# Altium PCB 夏友.PcbDoc (part 6 of 6)
Units mm, origin at the board's own origin, x right, y up, seen from the top; angles counter-clockwise.
Board outline 130.55 x 65.02 mm, 2 copper layers (Top Layer, Bottom Layer); 162 components, 175 nets, 628 pads, 694 vias.
Unrouted connection lines stored in the file: 1.
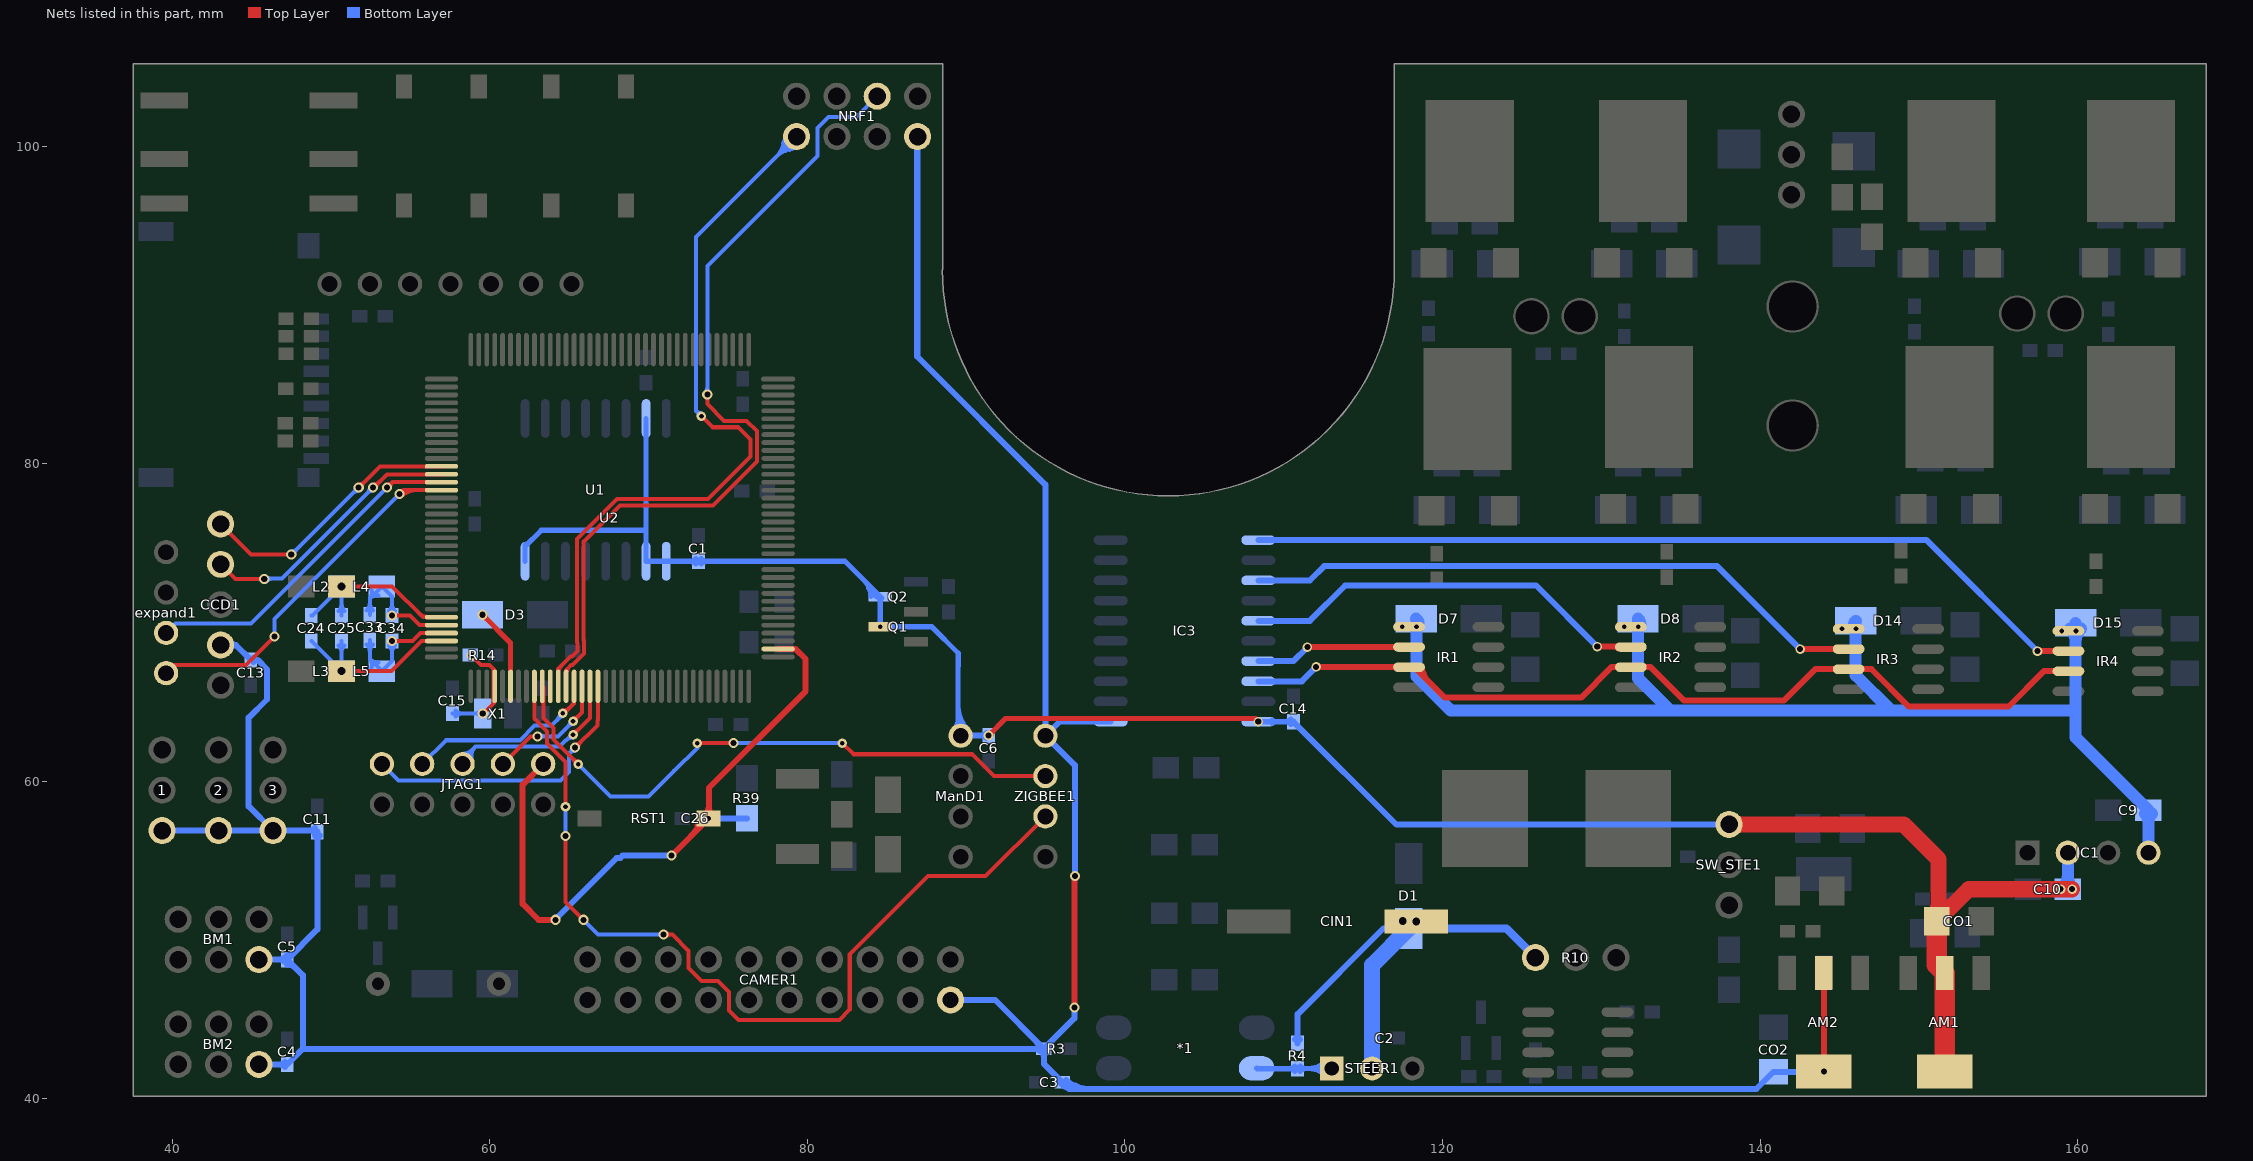
[diagram p6: the nets of this part, all layers, seen from the top]

## Via types
v1: diameter 0.6, hole 0.3, Top Layer to Bottom Layer, 442 vias
v2: diameter 0.635, hole 0.381, Top Layer to Bottom Layer, 150 vias
v3: diameter 0.6, hole 0.381, Top Layer to Bottom Layer, 48 vias
v4: diameter 0.7, hole 0.6, Top Layer to Bottom Layer, 16 vias
v5: diameter 0.6, hole 0.5, Top Layer to Bottom Layer, 10 vias
v6: diameter 0.6, hole 0.4, Top Layer to Bottom Layer, 7 vias
v7: diameter 0.7, hole 0.5, Top Layer to Bottom Layer, 5 vias
v8: diameter 0.6, hole 0.33, Top Layer to Bottom Layer, 5 vias
v9: diameter 0.7, hole 0.4, Top Layer to Bottom Layer, 3 vias
v10: diameter 1, hole 1, Top Layer to Bottom Layer, 2 vias
v11: diameter 3, hole 3, Top Layer to Bottom Layer, 2 vias
v12: diameter 1.016, hole 0.762, Top Layer to Bottom Layer, 2 vias
v13: diameter 0.7, hole 0.381, Top Layer to Bottom Layer, 1 vias
v14: diameter 0.635, hole 0.508, Top Layer to Bottom Layer, 1 vias

## Nets (pads, with @x,y where several pads share a name; then routed paths per layer and width w, separated by ;. In a path a pad name is that pad's centre, name@x,y a point inside that pad or via, vN(x,y) a via of type N, cw(c..) or ccw(c..) an arc to the next point about the centre after c; other vN are vias at no path point) (continued)
PTE9: CCD1.1 U2.12 | length 22.8
  Top Layer w0.254: CCD1.1@43.053,76.2 44.974,74.279 v2(47.502,74.279) ; v2(51.753,78.504) 51.779,78.504 53.106,79.831 U2.12@56.964,79.831 ; v2@51.753,78.694 ccw(c51.753,79.218) 52.123,78.848 cw(c51.753,79.218) v2@51.753,78.694 ; v2@51.943,78.504 cw(c52.339,78.504) 52.059,78.784 ccw(c52.339,78.504) v2@51.943,78.504
  Bottom Layer w0.254: v2(47.502,74.279) 47.527,74.279 v2(51.753,78.504) ; v2@51.562,78.502 cw(c51.121,78.496) 51.436,78.188 cw(c51.745,77.872) v2@51.75,78.313 ; v2@51.562,78.502 cw(c51.115,78.499) 51.427,78.179 ; v2@51.751,78.313 ccw(c51.747,77.866) 51.427,78.179 ; 51.427,78.179 cw(c51.753,77.853) 51.753,78.313 ccw(c51.753,77.853) 51.427,78.179 ; 51.427,78.179 ccw(c51.102,78.504) 51.562,78.504 cw(c51.102,78.504) 51.427,78.179 ; v2@47.502,74.469 ccw(c47.502,74.989) 47.87,74.622 cw(c47.502,74.989) v2@47.502,74.469 ; v2@47.693,74.279 cw(c48.092,74.279) 47.81,74.561 ccw(c48.092,74.279) v2@47.693,74.279
PTE10: CCD1.2 U2.13 | length 22.8
  Top Layer w0.254: CCD1.2@43.053,73.66 43.984,72.729 v2(45.802,72.729) ; v2(52.653,78.504) 52.704,78.504 53.531,79.331 U2.13@56.964,79.331 ; v2@52.653,78.694 ccw(c52.653,79.278) 53.065,78.865 cw(c52.653,79.278) v2@52.653,78.694 ; v2@52.843,78.504 cw(c53.179,78.504) 52.942,78.742 ccw(c53.179,78.504) v2@52.843,78.504
  Bottom Layer w0.254: v2(45.802,72.729) 45.849,72.775 46.924,72.775 v2(52.653,78.504) ; v2@52.462,78.502 cw(c52.021,78.496) 52.336,78.188 cw(c52.645,77.872) 52.65,78.313 ccw(c52.647,77.866) 52.327,78.179 ; v2@52.462,78.502 cw(c52.015,78.499) 52.327,78.179 ; 52.327,78.179 cw(c52.653,77.853) 52.653,78.313 ccw(c52.653,77.853) 52.327,78.179 ; 52.327,78.179 ccw(c52.002,78.504) 52.462,78.504 cw(c52.002,78.504) 52.327,78.179 ; v2@45.937,72.594 cw(c46.374,72.156) 46.374,72.775 ccw(c46.374,72.156) v2@45.937,72.594 ; v2@45.937,72.863 ccw(c46.15,73.076) 46.15,72.775 cw(c46.15,73.076) v2@45.937,72.863
PTE11: expand1.3 U2.14 | length 25.5
  Top Layer w0.254: v2(53.536,78.491) 53.875,78.831 U2.14@56.964,78.831 ; v2@53.537,78.682 ccw(c53.541,79.129) 53.861,78.817 ; v2@53.54,78.682 ccw(c53.551,79.104) 53.853,78.809 ccw(c54.148,78.507) v2@53.726,78.496 ; v2@53.726,78.493 cw(c54.173,78.497) 53.861,78.817 ; 53.851,78.807 cw(c53.543,79.123) 53.538,78.682 ccw(c53.543,79.123) 53.851,78.807 ; 53.852,78.807 ccw(c54.167,78.499) 53.726,78.494 cw(c54.167,78.499) 53.852,78.807 ; 53.861,78.817 cw(c53.536,79.142) 53.536,78.682 ccw(c53.536,79.142) 53.861,78.817 ; 53.861,78.817 ccw(c54.186,78.491) 53.726,78.491 cw(c54.186,78.491) 53.861,78.817
  Bottom Layer w0.254: expand1.3@39.624,69.342 40.207,69.925 44.969,69.925 v2(53.536,78.491)
PTE12: expand1.4 U2.15 | length 27.4
  Top Layer w0.254: expand1.4@39.624,66.802 40.147,67.325 44.65,67.325 v2(46.45,69.125) ; v2(54.325,78.1) 54.556,78.331 ; v2@54.374,78.284 ccw(c54.439,78.526) 54.564,78.309 ; v2@54.434,78.256 ccw(c54.697,78.634) 54.927,78.235 ; v2@54.511,78.139 cw(c54.683,78.175) 54.596,78.327 ; U2.15@56.964,78.331 54.556,78.331 ; 54.556,78.331 cw(c54.425,78.462) 54.376,78.284 ccw(c54.425,78.462) 54.556,78.331 ; 54.556,78.331 ccw(c54.687,78.2) 54.509,78.151 cw(c54.687,78.2) 54.556,78.331 ; v2@54.28,78.145 cw(c54.729,77.696) 54.729,78.331 ccw(c54.729,77.696) v2@54.28,78.145 ; v2@54.46,77.965 cw(c55.343,77.082) 55.343,78.331 ccw(c55.343,77.082) v2@54.46,77.965
  Bottom Layer w0.254: v2(46.45,69.125) 46.45,70.225 48.419,72.194 52.356,76.131 v2(54.325,78.1)
PTE26: U2.47
PTE27: NRF1.1 U2.48 | length 63.5
  Top Layer w0.254: U2.48@64.314,65.981 64.314,67.063 65.104,67.853 65.172,67.853 65.522,68.203 65.522,68.697 65.497,68.722 65.497,75.25 68.03,77.784 73.759,77.784 76.419,80.444 76.419,81.525 75.65,82.294 74.031,82.294 v1(73.337,82.987) ; U2.48@64.337,66.881 cw(c64.832,66.881) 64.482,67.231 ccw(c64.832,66.881) U2.48@64.337,66.881
  Bottom Layer w0.254: v1@73.164,82.987 ccw(c72.747,82.987) 73.042,83.283 ccw(c73.337,83.578) v1@73.337,83.16 ; v1(73.337,82.987) 73,83.325 73,94.275 NRF1.1@79.325,100.6 ; 78.374,99.75 cw(c79.564,99.431) NRF1.1@79.317,100.638 ; 78.475,99.649 ccw(c78.156,100.839) NRF1.1@79.363,100.592 ; 78.481,100.147 cw(c79.472,99.881) NRF1.1@79.266,100.887 ; 78.872,99.756 ccw(c78.606,100.747) NRF1.1@79.612,100.541 ; 78.091,99.366 cw(c79.325,98.132) 79.325,99.877 ccw(c79.325,98.132) 78.091,99.366 ; 78.091,99.366 ccw(c76.857,100.6) 78.602,100.6 cw(c76.857,100.6) 78.091,99.366 ; 78.524,99.799 cw(c79.325,98.999) 79.325,100.131 ccw(c79.325,98.999) 78.524,99.799 ; 78.524,99.799 ccw(c77.724,100.6) 78.856,100.6 cw(c77.724,100.6) 78.524,99.799
PTE28: NRF1.6 U2.49 | length 55.9
  Top Layer w0.254: U2.49@64.814,65.981 64.814,66.988 64.885,66.988 64.885,67.059 ; v2(73.704,84.354) 73.704,83.746 74.75,82.7 76.175,82.7 76.825,82.05 76.825,80.144 74.058,77.377 68.198,77.377 65.903,75.082 65.903,68.891 65.928,68.866 65.928,68.034 65.204,67.31 65.136,67.31 64.885,67.059 ; 64.885,67.059 ccw(c65.014,66.93) 64.836,66.886 cw(c65.014,66.93) 64.885,67.059 ; 64.885,67.059 cw(c64.692,67.059) 64.801,66.9 ccw(c64.692,67.059) 64.885,67.059 ; U2.49@64.837,66.881 cw(c65.151,66.881) 64.929,67.103 ccw(c65.151,66.881) U2.49@64.837,66.881
  Bottom Layer w0.254: v2(73.704,84.354) 73.704,92.439 80.65,99.385 80.65,101.125 81.35,101.825 83.09,101.825 NRF1.6@84.405,103.14 ; 73.704,84.814 cw(c73.244,84.814) 73.569,84.489 ccw(c73.244,84.814) 73.704,84.814 ; 73.704,84.814 ccw(c74.164,84.814) 73.838,84.489 cw(c74.164,84.814) 73.704,84.814
PWM1: IC3.17 IR1.2 | length 9.9
  Top Layer w0.381: v3(111.5,68.45) 117.893,68.45 IR1.2@117.896,68.453
  Bottom Layer w0.381: IC3.17@108.409,67.564 110.614,67.564 v3(111.5,68.45)
PWM2: IC3.15 IR2.2 | length 26.5
  Top Layer w0.381: v3(129.75,68.475) 131.844,68.475 IR2.2@131.866,68.453 ; 130.849,68.475 cw(c130.849,68.136) 131.089,68.376 ccw(c130.849,68.136) 130.849,68.475
  Bottom Layer w0.381: IC3.15@108.409,70.104 111.654,70.104 113.875,72.325 125.9,72.325 v3(129.75,68.475)
PWM3: IC3.13 IR3.2 | length 39.7
  Top Layer w0.381: v3(142.525,68.325) 142.526,68.326 IR3.2@145.582,68.326
  Bottom Layer w0.381: IC3.13@108.409,72.644 111.644,72.644 112.55,73.55 137.3,73.55 v3(142.525,68.325)
PWM4: IC3.11 IR4.2 | length 53.9
  Top Layer w0.381: v3(157.475,68.2) 159.424,68.2 IR4.2@159.425,68.199
  Bottom Layer w0.381: IC3.11@108.409,75.184 150.491,75.184 v3(157.475,68.2)
PWM_STEER: *1.4 R4.1 STEER1.1 | length 12.7
  Bottom Layer w0.33: *1.4@108.3,41.93 108.33,41.9 R4.1@110.875,41.9 110.885,41.91 STEER1.1@113.03,41.91 ; 110.308,41.9 cw(c110.308,41.333) 110.709,41.734 ccw(c110.308,41.333) 110.308,41.9 ; 110.308,41.9 ccw(c110.308,42.467) 110.709,42.066 cw(c110.308,42.467) 110.308,41.9 ; 111.618,41.91 cw(c111.618,40.498) 112.616,41.496 ccw(c111.618,40.498) 111.618,41.91 ; 111.618,41.91 ccw(c111.618,43.322) 112.616,42.324 cw(c111.618,43.322) 111.618,41.91 ; R4.1@111.041,41.734 cw(c111.466,41.309) 111.466,41.91 ccw(c111.466,41.309) R4.1@111.041,41.734 ; R4.1@111.041,42.066 ccw(c111.418,42.443) 111.418,41.91 cw(c111.418,42.443) R4.1@111.041,42.066
RESET: C26.2 JTAG1.10 R39.1 RST1.1 U2.74 | length 48.5
  Top Layer w0.381: JTAG1.10@63.373,61.087 62.075,59.789 62.075,52.275 63.075,51.275 v2(64.15,51.275) ; v2(71.45,55.325) 71.454,55.325 v1(73.787,57.658) 73.8,57.671 73.8,59.575 79.9,65.675 79.9,67.7 79.892,67.7 79.268,68.324 78.171,68.324 U2.74@78.164,68.331 ; RST1.1@73.103,57.238 cw(c73.813,57.048) RST1.1@73.507,57.716 ; RST1.1@73.246,57.5 cw(c73.539,57.147) RST1.1@73.739,57.559 ; 72.811,56.682 ccw(c71.836,57.658) 73.215,57.658 cw(c71.836,57.658) 72.811,56.682 ; RST1.1@73.562,57.883 ccw(c72.989,58.456) 73.8,58.456 cw(c72.989,58.456) RST1.1@73.562,57.883 ; 73.8,58.393 ccw(c74.522,58.393) 74.012,57.883 cw(c74.522,58.393) 73.8,58.393
  Bottom Layer w0.381: v2(64.15,51.275) 64.15,51.325 67.992,55.167 68.221,55.167 68.379,55.325 v2(71.45,55.325) ; v1(73.787,57.658) 73.792,57.663 R39.1@76.2,57.663 ; C26.2@73.967,57.51 cw(c74.337,57.14) 74.337,57.663 ccw(c74.337,57.14) C26.2@73.967,57.51 ; C26.2@73.967,57.806 ccw(c74.312,58.152) 74.312,57.663 cw(c74.312,58.152) C26.2@73.967,57.806
RX: U2.46 ZIGBEE1.2 | length 40.3
  Top Layer w0.254: U2.46@63.314,65.981 63.385,65.91 63.385,63.99 64.025,63.35 64.025,62.625 v1(65.575,61.075) ; v1(73.075,62.4) v2(75.35,62.4) ; v1(82.2,62.4) 82.9,61.7 90.375,61.7 91.75,60.325 ZIGBEE1.2@94.996,60.325 ; 65.28,61.37 cw(c64.984,61.075) 65.402,61.075 ccw(c64.984,61.075) 65.28,61.37 ; 65.28,61.37 ccw(c65.575,61.666) 65.575,61.248 cw(c65.575,61.666) 65.28,61.37 ; U2.46@63.298,65.065 cw(c63.088,64.855) 63.385,64.855 ccw(c63.088,64.855) U2.46@63.298,65.065
  Bottom Layer w0.254: v1(65.575,61.075) 67.6,59.05 70.01,59.05 71.623,60.663 71.638,60.663 73.075,62.1 v1(73.075,62.4) ; v2(75.35,62.4) v1(82.2,62.4)
SD: IC3.18 IR1.3 IR2.3 IR3.3 IR4.3 | length 59.4
  Top Layer w0.381: v3(112.05,67.2) 117.879,67.2 IR1.3@117.896,67.183 118.235,67.183 120.148,65.27 128.73,65.27 130.643,67.183 IR2.3@131.866,67.183 133.117,67.183 135.225,65.075 141.5,65.075 143.481,67.056 IR3.3@145.582,67.056 147.019,67.056 149.375,64.7 155.65,64.7 157.879,66.929 IR4.3@159.425,66.929 ; IR1.3@118.541,67.088 cw(c118.228,66.546) 118.833,66.708 ; 116.891,67.2 cw(c116.891,66.878) 117.119,67.106 ccw(c116.891,66.878) 116.891,67.2 ; IR1.3@118.705,67.183 ccw(c119.841,67.183) 119.038,66.38 cw(c119.841,67.183) IR1.3@118.705,67.183
  Bottom Layer w0.381: IC3.18@108.409,66.294 111.144,66.294 v3(112.05,67.2)
TCLK: JTAG1.4 U2.50 | length 15.3
  Top Layer w0.254: v1(64.6,64.275) 64.686,64.275 65.314,64.903 U2.50@65.314,65.981 ; v1@64.6,64.448 ccw(c64.6,65.073) 65.042,64.631 cw(c64.6,65.073) v1@64.6,64.448 ; 65.149,64.738 ccw(c64.806,65.081) 65.291,65.081 cw(c64.806,65.081) 65.149,64.738
  Bottom Layer w0.254: JTAG1.4@55.753,61.087 57.247,62.581 61.912,62.581 62.831,63.5 63.889,63.5 64.6,64.211 v1(64.6,64.275) ; 64.26,63.871 ccw(c63.856,64.275) 64.427,64.275 cw(c63.856,64.275) 64.26,63.871 ; 64.413,64.025 cw(c64.6,63.838) 64.6,64.102 ccw(c64.6,63.838) 64.413,64.025
TDI: JTAG1.8 U2.51 | length 12
  Top Layer w0.254: JTAG1.8@60.833,61.087 62.574,62.828 v2(63.003,62.828) ; v1(65.25,63.775) 65.814,64.339 U2.51@65.814,65.981 ; 65.545,64.07 cw(c65.25,64.366) 65.25,63.948 ccw(c65.25,64.366) 65.545,64.07 ; 65.545,64.07 ccw(c65.841,63.775) 65.423,63.775 cw(c65.841,63.775) 65.545,64.07
  Bottom Layer w0.254: v2(63.003,62.828) 64.303,62.828 v1(65.25,63.775) ; 63.463,62.828 cw(c63.463,63.288) 63.138,62.963 ccw(c63.463,63.288) 63.463,62.828 ; 63.463,62.828 ccw(c63.463,62.368) 63.138,62.693 cw(c63.463,62.368) 63.463,62.828 ; 64.955,63.48 cw(c65.25,63.184) 65.25,63.602 ccw(c65.25,63.184) 64.955,63.48 ; 64.955,63.48 ccw(c64.659,63.775) 65.077,63.775 cw(c64.659,63.775) 64.955,63.48
TDO: JTAG1.6 U2.52 | length 18.4
  Top Layer w0.254: v1(65.25,62.925) 66.314,63.989 U2.52@66.314,65.981 ; 65.545,63.22 cw(c65.25,63.516) 65.25,63.098 ccw(c65.25,63.516) 65.545,63.22 ; 65.545,63.22 ccw(c65.841,62.925) 65.423,62.925 cw(c65.841,62.925) 65.545,63.22
  Bottom Layer w0.254: JTAG1.6@58.293,61.087 58.293,61.368 59.1,62.175 ; v1(65.25,62.925) 65.15,62.925 64.4,62.175 59.1,62.175 ; 59.1,62.175 ccw(c59.707,61.568) 58.894,61.291 cw(c59.707,61.568) 59.1,62.175 ; JTAG1.6@58.293,61.722 ccw(c58.293,62.577) 58.897,61.972 cw(c58.293,62.577) JTAG1.6@58.293,61.722 ; JTAG1.6@58.654,61.21 cw(c59.276,61.421) 58.811,61.886 ccw(c59.276,61.421) JTAG1.6@58.654,61.21 ; 64.784,62.559 cw(c65.25,62.093) 65.25,62.752 ccw(c65.25,62.093) 64.784,62.559
TMS: JTAG1.2 U2.53 | length 25.9
  Top Layer w0.254: v2(65.38,62.114) 66.778,63.512 66.778,63.822 66.814,63.858 U2.53@66.814,65.981 ; v2@65.385,62.305 ccw(c65.396,62.727) 65.698,62.432 ccw(c65.993,62.13) v2@65.57,62.119 ; v2@65.57,62.116 cw(c66.018,62.119) 65.705,62.439 ; v2@65.382,62.305 ccw(c65.387,62.746) 65.696,62.43 cw(c65.387,62.746) v2@65.382,62.305 ; v2@65.382,62.305 ccw(c65.385,62.752) 65.705,62.439 ; 65.705,62.439 cw(c65.38,62.765) 65.38,62.305 ccw(c65.38,62.765) 65.705,62.439 ; 65.705,62.439 ccw(c66.03,62.114) 65.571,62.114 cw(c66.03,62.114) 65.705,62.439 ; v2@65.57,62.116 cw(c66.012,62.122) 65.696,62.43 ccw(c66.012,62.122) v2@65.57,62.116
  Bottom Layer w0.254: JTAG1.2@53.213,61.087 54.267,60.033 64.458,60.033 65,60.575 65,60.826 64.996,60.831 64.996,61.73 v2(65.38,62.114) 65.45,62.044 v2@65.45,62 ; 65.064,61.798 ccw(c64.748,62.107) v2@65.19,62.112 ; 65.064,61.798 cw(c65.373,61.482) 65.378,61.924 ccw(c65.375,61.476) 65.055,61.789 ; v2@65.19,62.113 cw(c64.742,62.109) 65.055,61.789 ; 65.055,61.789 cw(c65.38,61.464) 65.38,61.924 ccw(c65.38,61.464) 65.055,61.789 ; 65.055,61.789 ccw(c64.73,62.114) 65.19,62.114 cw(c64.73,62.114) 65.055,61.789
TX: U2.45 ZIGBEE1.3 | length 57.8
  Top Layer w0.254: U2.45@62.814,65.981 62.814,63.936 63.619,63.131 63.619,62.381 64.775,61.225 v1(64.775,58.4) ; v2(64.775,56.55) 64.775,52.4 v2(65.9,51.275) ; v2(70.95,50.35) 71.5,50.35 72.525,49.325 72.525,48.25 73.35,47.425 74.375,47.425 75.075,46.725 75.075,45.575 75.675,44.975 82.025,44.975 82.675,45.625 82.675,49.093 87.607,54.025 91.236,54.025 ZIGBEE1.3@94.996,57.785 ; 71.41,50.35 cw(c71.41,50.81) 71.085,50.485 ccw(c71.41,50.81) 71.41,50.35 ; 71.41,50.35 ccw(c71.41,49.89) 71.085,50.215 cw(c71.41,49.89) 71.41,50.35
  Bottom Layer w0.254: v2(64.775,56.55) v1(64.775,58.4) ; v2(65.9,51.275) 66.825,50.35 v2(70.95,50.35)
VBAT: D3.2 U2.42 | length 6.4
  Top Layer w0.33: v2(59.545,70.485) 61.314,68.716 U2.42@61.314,65.981 ; 59.805,70.225 cw(c60.065,70.485) 59.697,70.485 ccw(c60.065,70.485) 59.805,70.225 ; 59.805,70.225 ccw(c59.545,69.965) 59.545,70.333 cw(c59.545,69.965) 59.805,70.225
VCC-3.3V: 1.3 2.3 3.3 AM2.2 BM1.2 BM2.2 C3.2 C4.1 C5.1 C11.2 C13.2 CAMER1.2 CCD1.4 CO2.1 IC3.1 NRF1.7 R3.2 ZIGBEE1.1 | length 246.1
  Top Layer w0.381: v2(96.825,45.75) 96.825,54 v2(96.85,54.025) ; v3(144.018,41.731) AM2.2@144.018,47.931 ; 96.825,53.658 cw(c97.217,53.658) 96.94,53.935 ccw(c97.217,53.658) 96.825,53.658
  Bottom Layer w0.381: 1.3@39.37,56.896 2.3@42.926,56.896 3.3@46.355,56.896 ; CCD1.4@43.053,68.58 44.018,68.58 ; CCD1.4@43.667,68.34 cw(c44.018,68.204) 44.018,68.58 ; CCD1.4@43.667,68.82 ccw(c44.018,68.956) 44.018,68.58 ; C13.2@45.124,67.512 cw(c45.385,67.31) 45.385,67.64 ; C13.2@45.124,67.768 ccw(c45.385,67.97) 45.385,67.64 ; BM2.2@45.466,42.164 C4.1@47.244,42.164 48.23,43.15 ; BM1.2@45.466,48.768 C5.1@47.244,48.768 ; NRF1.7@86.945,100.6 86.925,100.58 86.925,86.75 94.996,78.679 ZIGBEE1.1@94.996,62.865 ; CAMER1.2@89.027,46.228 91.822,46.228 R3.2@94.9,43.15 ; 94.401,43.648 cw(c93.903,43.15) R3.2@94.608,43.15 ; C3.2@96.194,40.85 cw(c96.512,39.814) 97.053,40.752 ; v2(96.825,45.75) 96.825,45.075 R3.2@94.9,43.15 ; v2(96.85,54.025) 96.85,61.011 ZIGBEE1.1@94.996,62.865 ; IC3.1@99.109,63.754 95.885,63.754 ZIGBEE1.1@94.996,62.865 ; v3(144.018,41.731) 143.987,41.7 CO2.1@140.85,41.7 139.777,40.627 96.473,40.627 ; 44.018,68.58 C13.2@44.958,67.64 45.385,67.64 ; 45.385,67.64 45.975,67.05 45.975,65.15 44.825,64 44.825,58.426 3.3@46.355,56.896 ; 3.3@46.355,56.896 49.073,56.896 C11.2@49.149,56.82 49.149,50.673 C5.1@47.244,48.768 ; 46.738,42.164 cw(c46.738,41.658) 47.096,42.016 ccw(c46.738,41.658) 46.738,42.164 ; 46.738,42.164 ccw(c46.738,42.67) 47.096,42.312 cw(c46.738,42.67) 46.738,42.164 ; 46.738,48.768 cw(c46.738,48.262) 47.096,48.62 ccw(c46.738,48.262) 46.738,48.768 ; 46.738,48.768 ccw(c46.738,49.274) 47.096,48.916 cw(c46.738,49.274) 46.738,48.768 ; C5.1@47.244,48.768 48.23,47.782 48.23,43.15 ; 48.23,43.15 R3.2@94.9,43.15 ; 49.149,56.232 cw(c49.655,56.232) 49.297,56.589 ccw(c49.655,56.232) 49.149,56.232 ; 49.149,56.232 ccw(c48.643,56.232) 49.001,56.589 cw(c48.643,56.232) 49.149,56.232 ; 94.312,43.15 cw(c94.312,42.644) 94.669,43.002 ccw(c94.312,42.644) 94.312,43.15 ; 94.312,43.15 ccw(c94.312,43.656) 94.669,43.298 cw(c94.312,43.656) 94.312,43.15 ; 94.9,42.644 cw(c95.406,42.644) 95.048,43.002 ccw(c95.406,42.644) 94.9,42.644 ; 94.9,42.644 ccw(c94.394,42.644) 94.752,43.002 cw(c94.394,42.644) 94.9,42.644 ; R3.2@94.9,43.15 94.9,42.2 C3.2@96.05,41.05 96.473,40.627 ; 96.473,40.627 cw(c96.803,40.958) 96.34,41.021 ccw(c96.803,40.958) 96.473,40.627 ; C5.1@47.244,48.476 cw(c47.244,47.771) 47.742,48.27 ccw(c47.244,47.771) C5.1@47.244,48.476 ; C5.1@47.244,49.06 ccw(c47.244,49.765) 47.742,49.266 cw(c47.244,49.765) C5.1@47.244,49.06 ; 48.628,56.896 ccw(c48.628,57.423) 49.001,57.05 cw(c48.628,57.423) 48.628,56.896 ; 48.658,56.896 cw(c48.658,56.412) 49.001,56.754 ccw(c48.658,56.412) 48.658,56.896 ; R3.2@95.192,43.15 cw(c95.897,43.15) 95.398,43.648 ccw(c95.897,43.15) R3.2@95.192,43.15 ; 95.552,41.548 cw(c95.053,41.05) 95.758,41.05 ccw(c95.053,41.05) 95.552,41.548 ; C3.2@96.011,40.929 ccw(c96.739,41.656) 96.739,40.627 cw(c96.739,41.656) C3.2@96.011,40.929 ; C3.2@96.281,41.198 ccw(c97.659,42.576) 97.659,40.627 cw(c97.659,42.576) C3.2@96.281,41.198 ; 143.679,41.7 ccw(c143.679,42.07) 143.941,41.808 cw(c143.679,42.07) 143.679,41.7
VCC-5.5V: C2.2 CIN1.1 D1.2 R4.2 R10.1 STEER1.2 | length 33.8
  Bottom Layer w0.33: STEER1.2@115.57,41.91 STEER1.2@115.575,41.915
  Bottom Layer w0.381: R4.2@110.875,43.5 110.875,45.325 116.275,50.725 D1.2@117.875,50.725 ; 110.875,44.088 cw(c110.369,44.088) 110.727,43.731 ccw(c110.369,44.088) 110.875,44.088 ; 110.875,44.088 ccw(c111.381,44.088) 111.023,43.731 cw(c111.381,44.088) 110.875,44.088
  Bottom Layer w0.508: D1.2@117.875,50.725 124.027,50.725 R10.1@125.857,48.895
  Bottom Layer w1.016: STEER1.2@115.575,41.915 C2.2@115.575,43.825 115.575,48.425 D1.2@117.875,50.725 ; D1.2@117.169,50.019 ccw(c115.987,51.2) 117.658,51.2 cw(c115.987,51.2) D1.2@117.169,50.019
  other v7: 118.352,51.175 117.5,51.2
VCC-5V: AM1.2 C1.1 C6.1 C10.1 C14.1 CO1.1 IC1.2 IC3.20 ManD1.1 Q1.1 Q2.1 SW_STE1.1 U1.7 U1.9 U1.10 U1.16 | length 170
  Top Layer w0.33: v2(91.425,62.875) 92.494,63.944 108.205,63.944 v3(108.4,63.75) ; 91.685,63.135 cw(c91.425,63.395) 91.425,63.027 ccw(c91.425,63.395) 91.685,63.135 ; 91.685,63.135 ccw(c91.945,62.875) 91.577,62.875 cw(c91.945,62.875) 91.685,63.135
  Top Layer w1.016: SW_STE1.1@138.049,57.277 138.051,57.275 149.05,57.275 151.241,55.084 CO1.1@151.241,51.295 ; CO1.1@151.127,51.181 CO1.1@151.241,51.295 ; v3(159.65,53.2) 153.146,53.2 CO1.1@151.241,51.295 ; CO1.1@150.921,51.487 ccw(c150.146,52.262) 151.241,52.262 cw(c150.146,52.262) CO1.1@150.921,51.487 ; CO1.1@151.127,51.573 ccw(c151.127,52.519) 151.796,51.85 cw(c151.127,52.519) CO1.1@151.127,51.573
  Top Layer w1.27: CO1.1@151.127,51.181 151.127,48.442 AM1.2@151.638,47.931 AM1.2@151.638,41.731
  Bottom Layer w0.33: U1.16@62.23,73.85 62.23,74.78 63.25,75.8 69.825,75.8 69.85,75.775 ; U1.7@69.85,82.85 69.85,75.775 ; 83.858,72.213 ccw(c84.603,72.412) Q2.1@84.217,71.745 ; ManD1.1@89.662,62.865 89.5,63.027 89.5,67.252 89.51,67.262 89.51,68.065 87.852,69.723 v1(84.6,69.723) Q2.1@84.6,71.628 82.378,73.85 C1.1@73.15,73.85 U1.9@71.12,73.85 U1.10@69.85,73.85 69.85,75.775 ; v2(91.425,62.875) C6.1@91.475,62.925 ; IC3.20@108.409,63.754 C14.1@110.617,63.754 ; 72.583,73.85 cw(c72.583,73.283) 72.984,73.684 ccw(c72.583,73.283) 72.583,73.85 ; 72.583,73.85 ccw(c72.583,74.417) 72.984,74.016 cw(c72.583,74.417) 72.583,73.85 ; 73.717,73.85 cw(c73.717,74.417) 73.316,74.016 ccw(c73.717,74.417) 73.717,73.85 ; 73.717,73.85 ccw(c73.717,73.283) 73.316,73.684 cw(c73.717,73.283) 73.717,73.85 ; 84.6,70.049 cw(c84.274,70.049) 84.505,69.818 ccw(c84.274,70.049) 84.6,70.049 ; 84.6,70.049 ccw(c84.926,70.049) v1@84.695,69.818 ; 84.6,70.049 ccw(c84.926,70.049) v1@84.695,69.818 ; 84.6,71.302 cw(c84.926,71.302) 84.695,71.533 ccw(c84.926,71.302) 84.6,71.302 ; 84.6,71.302 ccw(c84.274,71.302) 84.505,71.533 cw(c84.274,71.302) 84.6,71.302 ; v1@84.695,69.818 ccw(c84.926,70.049) 84.926,69.723 ; v1@84.695,69.818 ccw(c84.926,70.049) 84.926,69.723 ; 84.926,69.723 ccw(c84.926,69.397) 84.695,69.628 cw(c84.926,69.397) 84.926,69.723 ; 109.51,63.754 cw(c109.51,64.08) 109.279,63.849 ccw(c109.51,64.08) 109.51,63.754 ; 109.51,63.754 ccw(c109.51,63.428) 109.279,63.659 cw(c109.51,63.428) 109.51,63.754 ; 110.05,63.754 cw(c110.05,63.187) 110.451,63.588 ccw(c110.05,63.187) 110.05,63.754 ; 110.05,63.754 ccw(c110.05,64.321) 110.451,63.92 cw(c110.05,64.321) 110.05,63.754 ; U1.16@62.23,74.91 ccw(c62.23,75.224) 62.452,75.002 cw(c62.23,75.224) U1.16@62.23,74.91 ; 83.602,72.626 cw(c82.603,71.628) 84.015,71.628 ccw(c82.603,71.628) 83.602,72.626 ; 84.165,72.063 cw(c83.73,71.628) 84.345,71.628 ccw(c83.73,71.628) 84.165,72.063 ; ManD1.1@89.24,63.287 ccw(c88.612,63.915) 89.5,63.915 cw(c88.612,63.915) ManD1.1@89.24,63.287 ; 89.5,63.9 ccw(c90.697,63.9) 89.851,63.054 cw(c90.697,63.9) 89.5,63.9 ; 89.5,64.697 ccw(c91.494,64.697) 90.084,63.287 cw(c91.494,64.697) 89.5,64.697 ; IC3.20@108.495,63.655 cw(c108.735,63.415) 108.735,63.754 ccw(c108.735,63.415) IC3.20@108.495,63.655 ; IC3.20@108.495,63.845 ccw(c108.716,64.066) 108.716,63.754 cw(c108.716,64.066) IC3.20@108.495,63.845
  Bottom Layer w0.381: ManD1.1@89.662,62.865 89.672,62.875 v2(91.425,62.875) ; C14.1@110.617,63.754 117.094,57.277 SW_STE1.1@138.049,57.277 ; 90.919,62.875 cw(c90.919,62.369) 91.277,62.727 ccw(c90.919,62.369) 90.919,62.875 ; 90.919,62.875 ccw(c90.919,63.381) 91.277,63.023 cw(c90.919,63.381) 90.919,62.875
  Bottom Layer w0.762: C10.1@159.385,53.205 IC1.2@159.385,55.499 ; C10.1@158.982,53.143 ccw(c158.01,54.115) 159.385,54.115 cw(c158.01,54.115) C10.1@158.982,53.143 ; C10.1@159.175,53.415 ccw(c158.668,53.922) 159.385,53.922 cw(c158.668,53.922) C10.1@159.175,53.415 ; C10.1@159.385,53.644 ccw(c160.094,53.644) 159.593,53.143 cw(c160.094,53.644) C10.1@159.385,53.644 ; 159.385,53.946 ccw(c160.136,53.946) 159.605,53.415 cw(c160.136,53.946) 159.385,53.946
  other v3: 158.925,53.2
VCC-15V: C9.1 D7.1 D8.1 D14.1 D15.1 IC1.4 IR1.1 IR2.1 IR3.1 IR4.1 | length 89.8
  Bottom Layer w0.762: D15.1@159.875,69.977 159.875,64.45 ; IC1.4@164.465,55.499 164.46,55.504 C9.1@164.46,58.166 159.875,62.751 159.875,64.45 ; D7.1@118.346,70.231 cw(c118.011,69.896) 118.437,69.687 ccw(c118.011,69.896) D7.1@118.346,70.231 ; D7.1@118.346,70.231 D7.1@118.375,70.202 ; D7.1@118.375,70.202 cw(c118.078,69.905) 118.432,69.68 ccw(c118.078,69.905) D7.1@118.375,70.202 ; D7.1@118.375,70.202 118.375,66.6 120.525,64.45 134.35,64.45 ; D8.1@132.316,70.231 cw(c131.981,69.896) 132.407,69.687 ccw(c131.981,69.896) D8.1@132.316,70.231 ; D8.1@132.316,70.231 D8.1@132.325,70.222 ; D8.1@132.325,70.222 cw(c132.002,69.899) 132.406,69.685 ccw(c132.002,69.899) D8.1@132.325,70.222 ; D8.1@132.325,70.222 132.325,66.475 134.35,64.45 ; 134.35,64.45 148.25,64.45 ; D14.1@146.025,70.097 ccw(c146.323,69.799) 145.985,69.548 cw(c146.323,69.799) D14.1@146.025,70.097 ; D14.1@146.025,70.097 D14.1@146.032,70.104 ; D14.1@146.025,70.097 146.025,66.675 148.25,64.45 ; D14.1@146.032,70.104 ccw(c146.338,69.798) 145.984,69.549 cw(c146.338,69.798) D14.1@146.032,70.104 ; 148.25,64.45 159.875,64.45 ; D15.1@159.568,69.572 ccw(c159.946,69.859) D15.1@159.882,69.389 ; D15.1@159.568,69.572 ccw(c159.946,69.859) D15.1@159.882,69.389 ; D15.1@159.568,69.572 ccw(c159.946,69.859) D15.1@159.882,69.389 ; 159.875,68.784 cw(c161.068,68.784) 160.224,69.628 ccw(c161.068,68.784) 159.875,68.784 ; 159.875,68.784 ccw(c158.682,68.784) 159.526,69.628 cw(c158.682,68.784) 159.875,68.784 ; 164.46,57.432 cw(c165.194,57.432) 164.675,57.951 ccw(c165.194,57.432) 164.46,57.432 ; 164.46,57.432 ccw(c163.726,57.432) 164.245,57.951 cw(c163.726,57.432) 164.46,57.432
  other v1: 159.004,69.469 159.893,69.469 145.161,69.596 146.05,69.596 117.475,69.723 118.364,69.723 131.445,69.723 132.334,69.723
VDDA: C24.2 C25.2 L2.2 L4.1 U2.31 | length 17.7
  Top Layer w0.254: L2.2@50.668,72.263 v5(50.678,72.263) 53.862,72.263 55.794,70.331 U2.31@56.964,70.331 ; L2.2@51.096,72.263 cw(c51.096,72.681) 50.8,72.385 ccw(c51.096,72.681) L2.2@51.096,72.263 ; L2.2@51.096,72.263 ccw(c51.096,71.845) 50.8,72.141 cw(c51.096,71.845) L2.2@51.096,72.263 ; 55.564,70.561 ccw(c56.064,71.061) 56.064,70.354 cw(c56.064,71.061) 55.564,70.561
  Bottom Layer w0.254: C24.2@48.768,70.434 48.849,70.434 v5(50.678,72.263) 50.678,70.439 C25.2@50.673,70.434 ; C25.2@50.48,70.71 ccw(c50.002,71.188) 50.678,71.188 ; 50.678,71.164 ccw(c51.32,71.164) C25.2@50.866,70.71 ; L4.1@50.383,71.968 cw(c50.678,71.672) 50.678,72.09 ccw(c50.678,71.672) L4.1@50.383,71.968 ; L4.1@50.383,71.968 ccw(c50.087,72.263) 50.505,72.263 cw(c50.087,72.263) L4.1@50.383,71.968 ; L4.1@50.678,71.845 cw(c51.096,71.845) 50.8,72.141 ccw(c51.096,71.845) L4.1@50.678,71.845 ; L4.1@50.678,71.845 ccw(c50.26,71.845) 50.556,72.141 cw(c50.26,71.845) L4.1@50.678,71.845
VRH: C33.1 C34.2 L4.2 U2.32 | length 12.3
  Top Layer w0.254: v2(53.848,70.434) 53.864,70.45 54.975,70.45 55.594,69.831 U2.32@56.964,69.831
  Bottom Layer w0.254: C33.1@52.258,70.761 ccw(c51.792,71.227) 52.451,71.227 ccw(c53.11,71.227) C33.1@52.644,70.761 ; C33.1@52.451,70.485 52.451,71.506 ; L4.2@52.549,72.035 cw(c52.116,71.841) 52.451,71.506 ; L4.2@53.007,71.707 ccw(c52.944,71.013) 52.451,71.506 ; C34.2@53.655,70.71 ccw(c53.189,71.176) 53.848,71.176 ccw(c54.507,71.176) C34.2@54.041,70.71 ; v2(53.848,70.434) 53.848,71.623 L4.2@53.208,72.263 52.451,71.506 ; C34.2@53.848,70.894 cw(c53.388,70.894) 53.713,70.569 ccw(c53.388,70.894) C34.2@53.848,70.894 ; C34.2@53.848,70.894 ccw(c54.308,70.894) 53.983,70.569 cw(c54.308,70.894) C34.2@53.848,70.894
VRL: C33.2 C34.1 L5.2 U2.33 | length 12.5
  Top Layer w0.254: v2(53.848,68.834) 53.857,68.825 55.125,68.825 55.631,69.331 U2.33@56.964,69.331
  Bottom Layer w0.254: C33.2@52.258,68.609 cw(c51.792,68.143) 52.451,68.143 cw(c53.11,68.143) C33.2@52.644,68.609 ; C33.2@52.451,68.885 52.451,67.686 ; L5.2@52.549,67.157 ccw(c52.116,67.351) 52.451,67.686 ; L5.2@53.007,67.485 cw(c52.944,68.179) 52.451,67.686 ; C34.1@53.655,68.558 cw(c53.189,68.092) 53.848,68.092 cw(c54.507,68.092) C34.1@54.041,68.558 ; v2(53.848,68.834) 53.848,67.569 L5.2@53.208,66.929 52.451,67.686 ; C34.1@53.848,68.374 cw(c54.308,68.374) 53.983,68.699 ccw(c54.308,68.374) C34.1@53.848,68.374 ; C34.1@53.848,68.374 ccw(c53.388,68.374) 53.713,68.699 cw(c53.388,68.374) C34.1@53.848,68.374
VSSA: C24.1 C25.1 L3.2 L5.1 U2.34 | length 16.7
  Top Layer w0.254: L3.2@50.668,66.929 v5(50.678,66.929) 53.804,66.929 55.706,68.831 U2.34@56.964,68.831 ; L3.2@51.096,66.929 cw(c51.096,67.347) 50.8,67.051 ccw(c51.096,67.347) L3.2@51.096,66.929 ; L3.2@51.096,66.929 ccw(c51.096,66.511) 50.8,66.807 cw(c51.096,66.511) L3.2@51.096,66.929
  Bottom Layer w0.254: C24.1@48.768,68.834 48.773,68.834 L5.1@50.673,66.934 ; C25.1@50.48,68.558 cw(c50.014,68.092) 50.673,68.092 cw(c51.332,68.092) C25.1@50.866,68.558 ; C25.1@50.673,68.834 L5.1@50.673,66.934 ; v5(50.678,66.929) L5.1@50.673,66.934 ; L5.1@50.383,67.224 cw(c50.087,66.929) 50.505,66.929 ccw(c50.087,66.929) L5.1@50.383,67.224 ; L5.1@50.383,67.224 ccw(c50.678,67.52) 50.678,67.102 cw(c50.678,67.52) L5.1@50.383,67.224 ; L5.1@50.556,67.051 ccw(c50.272,67.335) 50.673,67.335 cw(c50.272,67.335) L5.1@50.556,67.051 ; L5.1@50.673,67.359 ccw(c51.108,67.359) 50.8,67.051 cw(c51.108,67.359) L5.1@50.673,67.359
XTAL32: C15.1 R14.1 U2.40 X1.1 | length 11
  Top Layer w0.254: v2(58.85,67.925) 59.465,67.31 59.992,67.31 60.243,67.059 ; v2(59.563,64.262) 59.602,64.262 60.243,64.903 60.243,65.91 U2.40@60.314,65.981 60.243,66.052 60.243,67.059 ; 60.243,67.059 ccw(c60.436,67.059) 60.327,66.9 cw(c60.436,67.059) 60.243,67.059 ; 60.243,67.059 cw(c60.114,66.93) 60.292,66.886 ccw(c60.114,66.93) 60.243,67.059 ; 60.199,64.859 ccw(c59.977,65.081) 60.291,65.081 cw(c59.977,65.081) 60.199,64.859 ; 60.199,67.103 cw(c59.977,66.881) 60.291,66.881 ccw(c59.977,66.881) 60.199,67.103
  Bottom Layer w0.254: C15.1@57.658,64.262 v2(59.563,64.262) ; C15.1@57.851,64.069 cw(c58.317,63.603) 58.317,64.262 cw(c58.317,64.921) C15.1@57.851,64.455 ; X1.1@59.103,64.262 cw(c59.103,63.802) 59.428,64.127 ccw(c59.103,63.802) X1.1@59.103,64.262 ; X1.1@59.103,64.262 ccw(c59.103,64.722) 59.428,64.397 cw(c59.103,64.722) X1.1@59.103,64.262
pads on no net: BM1.4 BM1.5 BM1.6 BM2.4 BM2.5 BM2.6 CAMER1.4 CAMER1.6 CAMER1.10 CAMER1.14 CAMER1.16 IC3.4 IC3.6 IC3.8 IC3.12 IC3.14 IC3.16 JTAG1.7 JTAG1.9 MIC_SD1.10 MIC_SD1.11 MIC_SD1.12 MIC_SD1.13 OLED1.7 R10.3 SW_ENG1.3 U1.11 U1.12 U1.13 U1.15 U2.9 U2.144 Y1.2
copper on no net:
  other v10: 38.589,81.921 38.589,89.921
  other v11: 164.592,43.434 84.6,94.025

## Polygon pours and split planes (outlines as drawn)
GND on Bottom Layer "Top Layer-No Net" (solid, remove dead copper, pour order 10): 104.75,78.225 104.75,37.25 108.025,33.975 108.675,33.325 141.875,33.325 168.65,33.325 172.8,37.475 172.7,37.575 172.7,78.95 172.7,110.425 171.15,111.975 170.85,112.275 109.475,112.275
DGND on Bottom Layer "Top Layer-No Net" (solid, remove dead copper, pour order 16): 102.561,40.099 102.561,77.949 102.561,98.874 95.811,105.624 90.186,111.249 61.261,111.249 29.661,111.249 26.686,108.274 25.411,106.999 25.411,70.199 25.411,44.249 35.511,34.149 37.211,32.449 93.386,32.449
GND on Top Layer "Top Layer-No Net" (solid, remove dead copper, pour order 12): 104.75,78.175 104.75,38.75 108,35.5 110,37.5 154.35,37.5 168.35,37.5 171.075,40.225 171.325,40.475 171.325,65.25 171.325,107.725 170.95,108.1 169.8,109.25 150.7,109.25 115.125,109.25 112.875,107
DGND on Top Layer "Top Layer-No Net" (solid, remove dead copper, pour order 14): 102.575,39.525 102.575,83.325 101.65,84.25 101.65,99.9 101.65,101.425 93.075,110 89.8,113.275 27.4,113.275 27.4,67.65 24.85,65.1 27.325,62.625 27.325,34.425 97.6,34.425 99.325,32.7

## Keep-outs
Keep-Out Layer:
  lines w0.15: 37.542,105.177 37.542,40.162 168.094,40.162 168.094,105.177
  lines w0.245: 37.542,105.177 88.519,105.177 88.519,92.202 ; 116.967,92.202 116.967,105.177 168.094,105.177
  lines w0.254: 88.509,92.202 ccw(c102.738,92.202) 116.967,92.202

## Silkscreen, mask and mechanical layers (free items; w line width, h text height)
Top Overlay:
  drawing of 2431 lines, arcs and shapes, not listed
  text "夏目友人" at 98.806,69.723 h2.5
  text "黄科乐 胡皓斌" at 97.917,57.658 h2

## Text inside footprints (layer, text, board x,y; h text height)
CIN1: Top Overlay "+" at 116.244,53.969 h2.54 r270
D1: Bottom Overlay "+" at 116.859,56.585 h1 r90
D7: Bottom Overlay "+" at 116.586,69.215 h1 r180
D8: Bottom Overlay "+" at 130.556,69.215 h1 r180
D9: Bottom Overlay "+" at 125.222,93.599 h1
D10: Bottom Overlay "+" at 136.525,93.599 h1
D11: Bottom Overlay "+" at 125.349,78.105 h1
D12: Bottom Overlay "+" at 136.779,78.105 h1
D13: Bottom Overlay "+" at 54.61,46.228 h1 r180
D14: Bottom Overlay "+" at 144.272,69.088 h1 r180
D15: Bottom Overlay "+" at 158.115,68.961 h1 r180
D16: Bottom Overlay "+" at 155.829,93.599 h1
D17: Bottom Overlay "+" at 167.259,93.726 h1
D18: Bottom Overlay "+" at 155.702,78.105 h1
D19: Bottom Overlay "+" at 167.259,78.105 h1
TMB1: Top Overlay "+" at 59.817,49.784 h1.52 r270